# Altium PCB Projekt91_v3.PcbDoc
Units mm, origin at the board's own origin, x right, y up, seen from the top; angles counter-clockwise.
Board outline 135 x 75 mm, 2 copper layers (Top Layer, Bottom Layer); 42 components, 46 nets, 270 pads, 24 vias.
Unrouted connection lines stored in the file: 3.
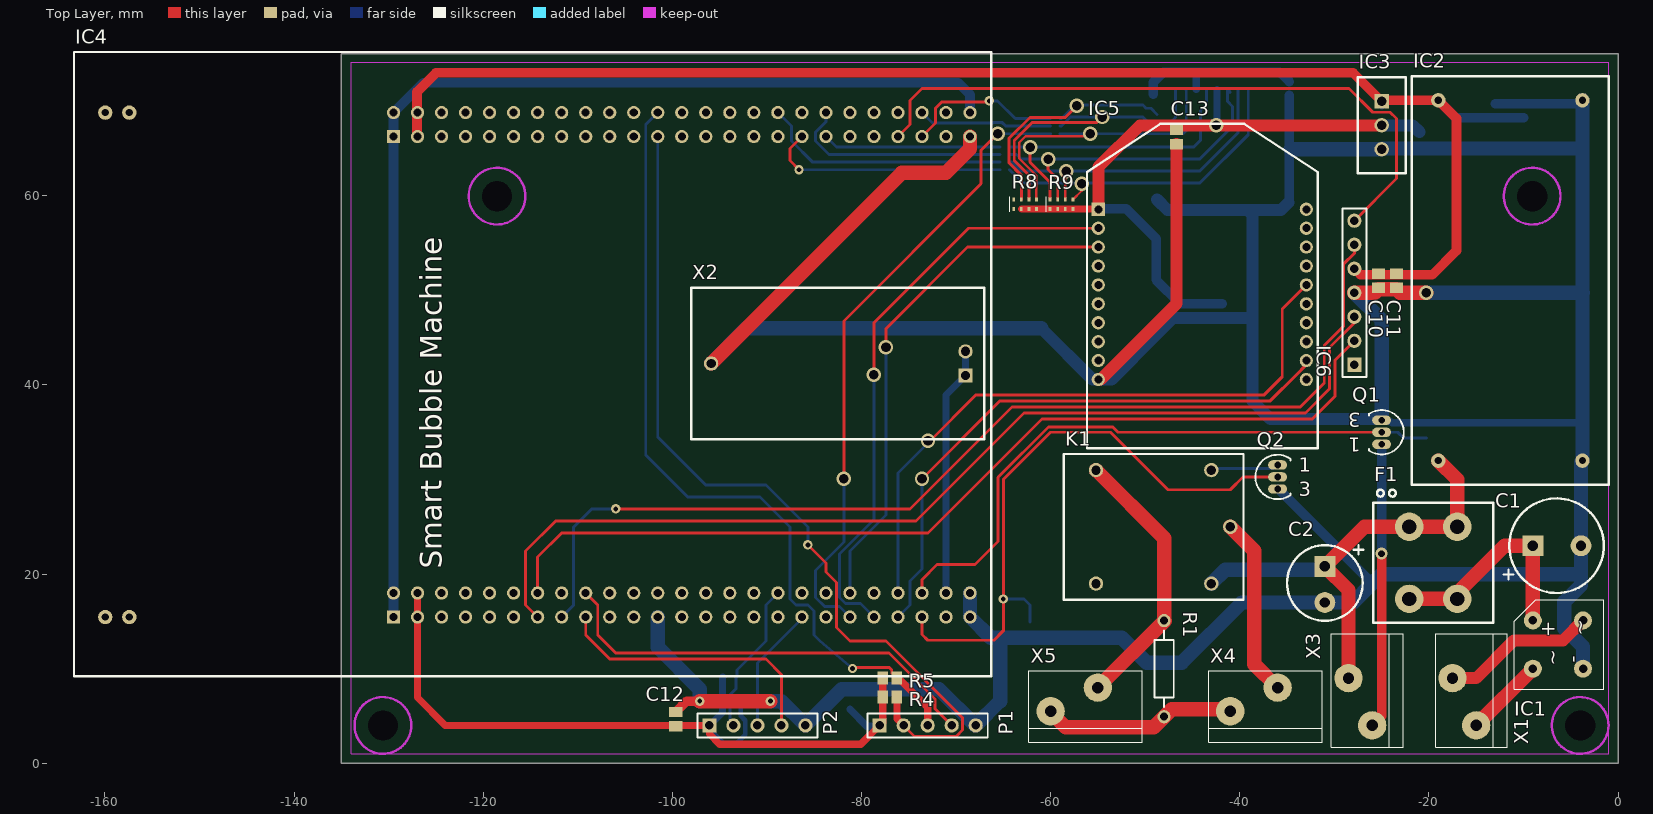
[diagram p0: Top Layer view]
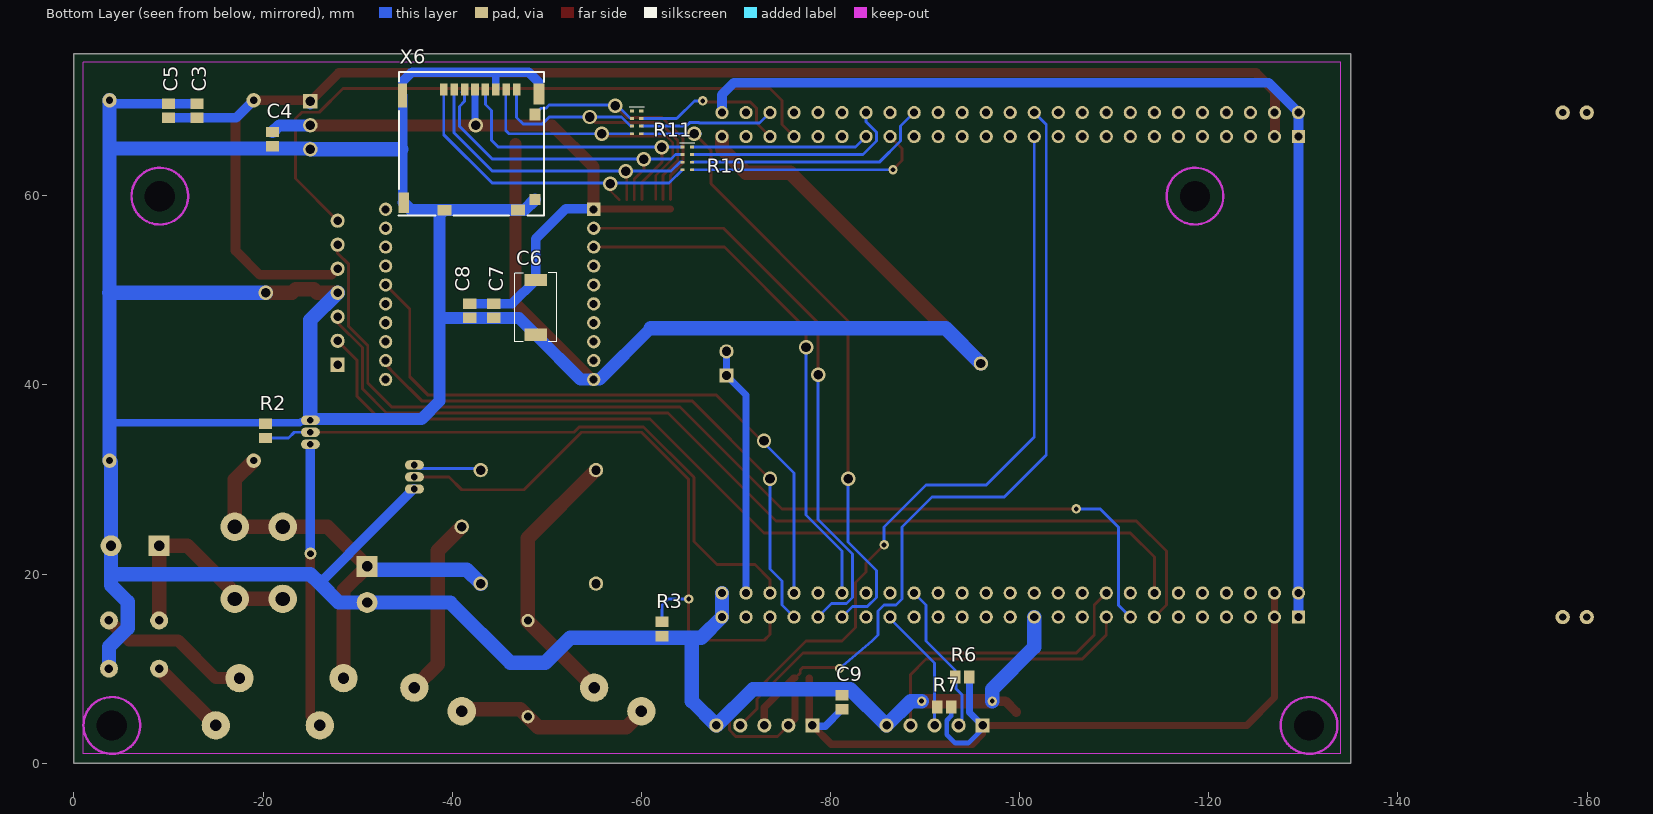
[diagram p1: Bottom Layer view, seen from below]

## Layer stack, top to bottom
Top Layer: signal copper 0.0356
Dielectric: dielectric 0.32, FR-4, Dk 4.8
Bottom Layer: signal copper 0.0356

## Board outline
-135,0 -135,75 0,75 0,0

## Design rules (kind name [scope] priority, off if disabled: settings)
Clearance 220V [(InNet('220V1') OR InNet('220V2') OR InNet('220V3'))] p1 off: gap=3 // 4mm Clearance between 220V tracks
Clearance Clearance_1 [All] p2: gap=0.254
ComponentClearance [All] p1: gap=0.254 collisioncheckmode=3 verticalgap=0.254
HoleSize [All] p1: absolutevalues=TRUE maxlimit=25.4 minlimit=0.025 maxpercent=80.000 minpercent=20.000
PolygonConnect [All] p1: connectstyle=Relief reliefconductorwidth=0.254 reliefentries=4 polygonreliefangle="90 Angle"
RoutingVias [All] p1: holewidth=0.5 width=1 viastyle="Through Hole" minholewidth=0.3 minwidth=0.3 maxholewidth=5 maxwidth=3
SolderMaskExpansion [All] p1: expansion=0.102
TestPointUsage FabricationTestPointUsage [All] p1: valid=0 allowmultiple=FALSE
Testpoint FabricationTestpoint [All] p1: side=3 testpointundercomponent=TRUE minsize=1.016 maxsize=2.54 preferedsize=1.524 minholesize=0 maxholesize=1.016 preferedholesize=0.813 testpointgrid=0.025 style=297 order=0123456789
Width [All] p1: maxlimit=1.524 minlimit=0.254 preferedwidth=0.254
17 further rules are at their usual default settings.

## Components (designator, comment, footprint, x,y, rotation, side; value= is the part's Value field where it differs from the comment)
C1 "Cap Pol1" rad-5 -9,23 r0 top
C2 "100u" RAD-3.5 -31,20.81 r270 top
C3 "10u" C0805 -13,69 r90 bottom
C4 "10u" C0805 -21,66 r270 bottom
C5 "22u" C0805 -10,69 r270 bottom
C6 "220u/Ta/low ESR" D_case -48.835,51.105 r270 bottom
C7 "100n" C0805 -44.39,47.845 r90 bottom
C8 "22u" C0805 -41.85,47.845 r90 bottom
C9 "100n" C0805 -81.22,6.455 r270 bottom
C10 "10u" c0805 -25.34,51.02 r90 top
C11 "100n" C0805 -23.435,51.02 r90 top
C12 "100n" C0805 -99.635,4.665 r270 top
C13 "100n" C0805 -46.676,66.222 r90 top
F1 "FUSE-FPG4, 1.6 AF" FUSE-FPG4 -17,17.38 r180 top
IC1 "12VDC" graetz2 -9,10 r90 top
IC2 "Regulator 12V5V" regulator -0.966,29.46 r180 top
IC3 "LM1085" TO-220 -25,70 r0 top
IC4 "STM32F4DISCOVERY" STM32F4DISC_BACK -66.277,9.217 r90 top
IC5 "RN_XV_WiFly" RN-XV -56.125,33.336 r90 top
IC6 "Header 7" HDR1X7 -27.88,42.13 r90 top
K1 "Relay-SPDT" relay -43,19 r180 top
P1 "Header 5" HDR1X5 -78.08,4 r0 top
P2 "Header 5" HDR1X5 -96.08,4 r0 top
Q1 "Power nMOS - BS170" to-92 -25,35 r180 top
Q2 "Power nMOS - BS170" to-92 -36,30.27 r0 top
R1 "1M/500 V" AXIAL-0.4 -48,10 r270 top
R2 "10k" C0805 -20.26,35.145 r90 bottom
R3 "10k" C0805 -62.17,14.19 r270 bottom
R4 "10k" C0805 -77,7 r0 top
R5 "10k" C0805 -77,9 r0 top
R6 "10k" C0805 -93.92,9.11 r0 bottom
R7 "10k" C0805 -92.015,5.935 r0 bottom
R8 "ResNet4" resnet4 -63.897,59.618 r0 top
R9 "ResNet4" resnet4 -60.049,59.602 r0 top
R10 "ResNet4" resnet4 -65.345,65.155 r270 bottom
R11 "ResNet4" resnet4 -59.995,68.965 r270 bottom
X1 "PTSA 1.5/2-3,5-Z" PTSA_2.5MM_x2 -17.5,9 r180 top
X2 "BAT_Holder" BAT_Holder -69,42.27 r180 top
X3 "PTSA 1.5/2-3,5-Z" PTSA_2.5MM_x2 -28.5,9 r180 top
X4 "PTSA 1.5/2-3,5-Z" PTSA_2.5MM_x2 -36,8 r90 top
X5 "PTSA 1.5/2-3,5-Z" PTSA_2.5MM_x2 -55,8 r90 top
X6 "SD_CARD_MOLEX" MOLEX-MICROSD-503182-1853 -39.105,71.235 r180 bottom

## Footprints (in the part's own frame and the unit in brackets; to place one, negate y for a bottom-side part, rotate by r counter-clockwise, add the part's x,y. Pads: shape width x height; smd on the part's side, far side on the other; paste and mask are expansions set on the pad)
AXIAL-0.4 [mm] "Axial Device, Thru-Hole; 2 Leads; 0.4 in Pin Spacing"
  round 1.4 hole 0.85: 1(-5.08,0) 2(5.08,0)
  silkscreen extent -4.06,-1.02 4.06,1.02
BAT_Holder [mil] "Holder for CR2032 by Renata"
  rect 60x60 hole 39.37: 1(0,50)
  round 60 hole 39.37: 2(0,-50) 3(1059.06,0)
  silkscreen extent -79,-315 1142,315
C0805 [mm] "Chip Capacitor, Body 2.0x1.3mm, IPC High Density"
  rect 1.1x1.4 smd: 1(-0.75,0) 2(0.75,0)
  body extent -1.1,-0.72 1.1,0.72, height 1.4
c0805 [mm] "Chip Capacitor, Body 2.0x1.3mm, IPC High Density"
  rect 1.1x1.4 smd: 1(-0.75,0) 2(0.75,0)
  body extent -1.1,-0.72 1.1,0.72, height 1.4
D_case [mm]
  rect 1.3x2.4 smd: 1(0,0) 2(5.8,0)
  silkscreen extent -0.75,-2.25 6.55,2.22
FUSE-FPG4 [mm]
  round 3 hole 1.5: 1(0,0) 2(5.08,0) 3(5.08,-7.62) 4(0,-7.62)
  silkscreen extent -3.81,-11.53 8.89,2.54
graetz2 [mm]
  round 1.9 hole 0.9: 1(5.1,0) 2(0,0) 3(0,-5.3) 4(5.1,-5.3)
  silkscreen extent -2.2,-7.5 7.3,2
HDR1X5 [mm] "Connector; Header; 5 Position"
  rect 1.5x1.5 hole 0.9: 1(0,0)
  round 1.5 hole 0.9: 2(2.54,0) 3(5.08,0) 4(7.62,0) 5(10.16,0)
  silkscreen extent -1.27,-1.27 11.43,1.27
HDR1X7 [mm] "Connector; Header; 7 Position"
  rect 1.5x1.5 hole 0.9: 1(0,0)
  round 1.5 hole 0.9: 2(2.54,0) 3(5.08,0) 4(7.62,0) 5(10.16,0) 6(12.7,0) 7(15.24,0)
  silkscreen extent -1.27,-1.27 16.51,1.27
MOLEX-MICROSD-503182-1853 [mm]
  rect 0.8x1.24 smd: 1(0,0) 2(1.1,0) 3(2.2,0) 4(3.3,0) 5(4.4,0) 6(5.5,0) 7(6.6,0) 8(7.7,0)
  rect 1.16x1.25 smd: 9(9.64,-2.63)
  rect 1.16x1.2 smd: 10(9.64,-11.63)
  rect 0.95x2.5 smd: 11(-4.35,-0.63)
  rect 1.15x2.2 smd: 12(10.05,-0.47) 13(-4.24,-11.96)
  rect 1.5x1.15 smd: 14(0.06,-12.76) 15(7.85,-12.75)
  silkscreen extent -4.78,-13.33 10.59,1.87
PTSA_2.5MM_x2 [mm]
  round 3 hole 1.2: 1(0,0) 2(-2.5,5)
  silkscreen extent -5.8,-4.7 1.8,7.3
RAD-3.5 [mm] "Radial 3.5mm; 8mm diameter"
  rect 2.2x2.2 hole 1.1: 1(0,0)
  round 2.2 hole 1.1: 2(3.81,0)
  silkscreen extent -2.27,-4 5.75,4.05
rad-5 [mm] "Radial 5mm; 10mm diameter"
  rect 2.2x2.2 hole 1.1: 1(0,0)
  round 2.2 hole 1.1: 2(5.08,0)
  silkscreen extent -3.09,-5 7.5,5
regulator [mil]
  round 60 hole 30: 1(710,-100) 2(110,-100) 3(710,-1600) 4(110,-1600)
  silkscreen extent 0,-1700 820,0
relay [mm]
  round 1.524 hole 1: 1(-2,-6) 2(12.2,0) 3(12.2,-12) 4(0,0) 5(0,-12)
  silkscreen extent -3.4,-13.7 15.6,1.7
resnet4 [mm]
  rect 0.3x0.45 smd: 1(0,0) 2(0.8,0) 3(1.6,0) 4(2.4,0) 5(0,-1) 6(0.8,-1) 7(1.6,-1) 8(2.4,-1)
  silkscreen extent -0.4,-1.3 -0.4,0.3
RN-XV [mm] "RN-XV WiFly Pinout"
  rect 1.4x1.4 hole 0.85: 1(25.239,-1.165)
  round 1.4 hole 0.85: 2(23.239,-1.165) 3(21.239,-1.165) 4(19.239,-1.165) 5(17.239,-1.165) 6(15.239,-1.165) 7(13.239,-1.165) 8(11.239,-1.165) 9(9.239,-1.165) 10(7.239,-1.168) 11(7.239,-23.165) 12(9.239,-23.165) 13(11.239,-23.165) 14(13.239,-23.165) 15(15.239,-23.165) 16(17.239,-23.165) 17(19.239,-23.165) 18(21.239,-23.165) 19(23.239,-23.165) 20(25.239,-23.165)
  silkscreen extent -0.03,-24.36 34.26,0.03, body extent 0,-24.38 34.29,0, height 12
STM32F4DISC_BACK [mm] "STM32F4Discovery without pins [101..106]"
  rect 1.4x1.4 hole 0.85: 1(6.243,63.203) 51(57.043,63.203)
  round 1.4 hole 0.85: 2(8.783,63.203) 3(6.243,60.663) 4(8.783,60.663) 5(6.243,58.123) 6(8.783,58.123) 7(6.243,55.583) 8(8.783,55.583) 9(6.243,53.043) 10(8.783,53.043) 11(6.243,50.503) 12(8.783,50.503) 13(6.243,47.963) 14(8.783,47.963) 15(6.243,45.423) 16(8.783,45.423) 17(6.243,42.883) 18(8.783,42.883) 19(6.243,40.343) 20(8.783,40.343) 21(6.243,37.803) 22(8.783,37.803) 23(6.243,35.263) 24(8.783,35.263) 25(6.243,32.723) 26(8.783,32.723) 27(6.243,30.183) 28(8.783,30.183) 29(6.243,27.643) 30(8.783,27.643) 31(6.243,25.103) 32(8.783,25.103) 33(6.243,22.563) 34(8.783,22.563) 35(6.243,20.023) 36(8.783,20.023) 37(6.243,17.483) 38(8.783,17.483) 39(6.243,14.943) 40(8.783,14.943) 41(6.243,12.403) 42(8.783,12.403) 43(6.243,9.863) 44(8.783,9.863) 45(6.243,7.323) 46(8.783,7.323) 47(6.243,4.783) 48(8.783,4.783) 49(6.243,2.243) 50(8.783,2.243) 52(59.583,63.203) 53(57.043,60.663) 54(59.583,60.663) 55(57.043,58.123) 56(59.583,58.123) 57(57.043,55.583) 58(59.583,55.583) 59(57.043,53.043) 60(59.583,53.043) 61(57.043,50.503) 62(59.583,50.503) 63(57.043,47.963) 64(59.583,47.963) 65(57.043,45.423) 66(59.583,45.423) 67(57.043,42.883) 68(59.583,42.883) 69(57.043,40.343) 70(59.583,40.343) 71(57.043,37.803) 72(59.583,37.803) 73(57.043,35.263) 74(59.583,35.263) 75(57.043,32.723) 76(59.583,32.723) 77(57.043,30.183) 78(59.583,30.183) 79(57.043,27.643) 80(59.583,27.643) 81(57.043,25.103) 82(59.583,25.103) 83(57.043,22.563) 84(59.583,22.563) 85(57.043,20.023) 86(59.583,20.023) 87(57.043,17.483) 88(59.583,17.483) 89(57.043,14.943) 90(59.583,14.943) 91(57.043,12.403) 92(59.583,12.403) 93(57.043,9.863) 94(59.583,9.863) 95(57.043,7.323) 96(59.583,7.323) 97(57.043,4.783) 98(59.583,4.783) 99(57.043,2.243) 100(59.583,2.243)
  round 1.524 hole 0.762: 101(6.243,91.143) 102(6.243,93.683) 103(59.583,91.143) 104(59.583,93.683)
  silkscreen extent -0.01,-0.01 65.99,96.99, body extent 0,0 66,97, height 12
to-92 [mm] "TO, Flat Index; 3 In-Line, Axial Leads; Body Dia. 4.6mm; Leads 0.41 x 0.39 mm (max)"
  oval 2x1 hole 0.7: 1(0,1.27) 2(0,0) 3(0,-1.27)
  silkscreen extent -2.34,-2.34 1.35,2.34
TO-220 [mil]
  rect 60x60 hole 39.37: 1(0,0)
  round 60 hole 39.37: 2(0,-100) 3(0,-200)
  silkscreen extent -100,-300 100,100

## Part data
C1: "Polarized Capacitor (Radial)"
C2 C6: library part "Cap Pol1", "Polarized Capacitor (Radial)"
C3 C4: library part "Cap Pol3", "Polarized Capacitor (Surface Mount)"
C5 C7 C8 C9 C10 C11 C12 C13: library part Cap, "Capacitor"
F1: library part FUSE-FPG4
IC1: library part Bridge2, "Diode Bridge"
IC2: library part Regulator
IC4: library part STM32F4DISC_w/o[101..106]
IC6: "Header, 7-Pin"
K1: "Single-Pole Dual-Throw Relay"
P1 P2: "Header, 5-Pin"
Q1 Q2: library part MOSFET-N, "N-Channel MOSFET"
R1 R2 R3 R4 R5 R6 R7: library part Res2, "Resistor"
X1 X3 X4 X5: library part "Header 2", "Header, 2-Pin"

## Free pads (board coordinates)
  round 3 hole 3.2: 0(-130.6,4) 0(-118.535,59.965) 0(-9.08,59.965) 0(-4,4) 0(-4,4)

## Via types
v1: diameter 1.524, hole 1.016, Top Layer to Bottom Layer, 15 vias
v2: diameter 1, hole 0.5, Top Layer to Bottom Layer, 8 vias
v3: diameter 1.27, hole 0.711, Top Layer to Bottom Layer, 1 vias

## Nets (pads, with @x,y where several pads share a name; then routed paths per layer and width w, separated by ;. In a path a pad name is that pad's centre, name@x,y a point inside that pad or via, vN(x,y) a via of type N, cw(c..) or ccw(c..) an arc to the next point about the centre after c; other vN are vias at no path point)
220V1: K1.1 X4.1 | length 19.1
  Top Layer w1.524: K1.1 -38.476,22.476 -38.476,10.476 X4.1
220V2: R1.2 X4.2 X5.2 | length 20.3
  Top Layer w1.524: X5.2 -60,5.39 -58.42,3.81 -49.11,3.81 -47.205,5.715 X4.2@-41.275,5.715
220V3: K1.3 R1.1 X5.1 | length 28.5
  Top Layer w1.524: K1.3 -48,23.8 R1.1@-48,15.478 ; X5.1 R1.1@-47.92,15.08
+3.3V: C9.2 C12.2 IC4.3 IC4.4 P1.1 P2.1 R4.1 R5.1 R6.1 R7.1 | length 86.3
  Top Layer w0.762: IC4.4 IC4.3 -126.94,6.94 -124,4 P2.1 -96.08,3.08 -95,2 -80.08,2 P1.1 -77.75,4.33 R4.1 R5.1
  Bottom Layer w0.508: P2.1 -96.08,3.65 -94.555,2.125 -93.184,2.125 -92.282,3.027 -92.282,4.521 -92.765,5.004 R7.1
  Bottom Layer w0.762: P2.1 -94.707,5.373 -94.707,9.073 R6.1 ; C9.2 -79.43,3.915 -78.165,3.915 P1.1
+3.3V-WIFLY: C4.1 C6.1 C7.2 C8.2 C13.2 IC3.2 IC5.1 R8.6 R8.7 R8.8 R9.5 R9.6 R9.7 R9.8 X6.4 | length 72.2
  Top Layer w0.762: R8.6@-63.081,58.602 R9.5 R9.6 R9.7 R9.8 -54.987,58.602 IC5.1
  Top Layer w1.27: IC5.1 -54.96,63.04 -50.54,67.46 v1(-42.485,67.46) IC3.2
  Bottom Layer w0.762: v1@-42.405,67.54 X6.4
  Bottom Layer w1.016: IC5.1 -54.895,58.64 -52.01,58.64 -48.835,55.465 C6.1 -46.325,48.595 C7.2 C8.2
  Bottom Layer w1.27: IC3.2 -21.71,67.46 C4.1
+5V: C3.1 C5.2 C10.2 C11.2 IC2.3 IC3.1 IC4.53 IC4.54 IC6.5 | length 153.7
  Top Layer w1.016: IC4.53 -127,66.32 -127,71 -125,73 -28,73 IC3.1 ; IC6.5 -27.245,51.655 -19.625,51.655 -17.085,54.195 -17.085,68.185 IC2.3 IC3.1@-24.9,70.1
  Bottom Layer w1.016: IC3.1@-25,69.615 IC3.1 ; IC2.3 -17.15,68.25 C5.2
+12V: C2.1 F1.3 F1.4 IC2.1 K1.4 X3.1 | length 49.2
  Top Layer w1.524: X3.1 -28.5,18.31 C2.1 -26.81,25 F1.3 F1.4 -17,30 IC2.1
  Bottom Layer w1.524: K1.4 -41.524,20.476 -31.334,20.476 C2.1
GND: C1.2 C2.2 C3.2 C4.2 C5.1 C6.2 C7.1 C8.1 C9.1 C10.1 C11.1 C12.1 C13.1 IC1.3 IC2.2 IC2.4 IC3.3 IC4.1 IC4.2 IC4.5 IC4.23 IC4.49 IC4.50 IC4.51 IC4.52 IC4.99 IC4.100 IC5.10 IC6.4 P1.5 P2.5 Q1.3 Q2.3 R2.2 R3.2 X2.3 X6.6 X6.10 X6.11 X6.12 X6.13 X6.14 X6.15 | length 634.1
  Top Layer w1.016: C12.1 -98.48,6.57 v2(-97.095,6.57)
  Top Layer w1.27: IC5.10 -54.713,40.575 -46.676,48.612 C13.1
  Top Layer w1.524: v2(-97.095,6.57) v2(-89.628,6.57) ; X2.3 -75.72,62.45 -71.06,62.45 -68.52,64.99 IC4.99 ; IC6.4 -25.721,49.75 -25.34,50.131 -23.435,50.131 -23.054,49.75 v1(-20.26,49.75)
  Bottom Layer w0.762: X6.6 -44.605,72.992 ; X6.13 X6.13@-34.755,59.385 ; Q1.3 -24.865,36.135 -24.03,36.135 -23.895,36 -3.76,36
  Bottom Layer w1.016: IC4.1 IC4.2 IC4.51 IC4.52 -126.305,71.975 -69.79,71.975 -68.52,70.705 IC4.100 ; X6.12 -49.155,71.998 -48.073,73.08 -35.754,73.08 -34.755,72.081 ; Q2.3 -35.912,29 -29.138,22.226 -29.138,22.188 -25.975,19.025 ; X6.13@-34.755,59.385 X6.11 ; C3.2 -4.11,69.75 IC2.4
  Bottom Layer w1.27: -61,46 -55.575,40.575 IC5.10 -53.565,40.575 C6.2 -47.045,47.095 C7.1 C8.1 -38.79,47.095 -38.675,47.21 ; X6.10 -47.615,58.475 X6.14 ; X6.13 -35.665,58.475 X6.14 ; Q1.3@-25,36.389 -36.744,36.389 -38.675,38.32 -38.675,47.21 ; X6.14 -38.675,57.985 -38.675,47.21
  Bottom Layer w1.524: IC4.23 -101.54,12.285 -97.095,7.84 v2(-97.095,6.57) ; X2.3 -92.17,46 -61,46 ; v2(-89.628,6.57) -88.49,6.57 P2.5 -82.08,7.84 -71.803,7.84 -67.963,4 P1.5 -65.345,6.575 -65.345,13.262 ; IC4.50 IC4.49 -66.322,13.262 -65.345,13.262 ; -34.596,64.92 IC3.3 -24.92,65 -4,65 ; IC6.4 -25,46.87 Q1.3@-25,36.516 ; v1(-20.26,49.75) -3.75,49.75 ; IC2.4 -3.76,36 IC2.2 -3.92,31.84 C1.2 -3.92,20 ; IC1.3 -3.7,12.32 -5.666,14.286 -5.666,17.066 -3.92,18.812 -3.92,20 ; -65.345,13.262 -52.492,13.262 -49.848,10.618 -46.152,10.618 -39.77,17 C2.2 -28,17 -25.975,19.025 -25,20 -3.92,20
GPIO_HC_KEY: IC4.15 IC6.6 | length 111.7
  Top Layer w0.305: v2(-105.985,26.89) -74.87,26.89 -64.075,37.685 -33.595,37.685 -31.061,40.219 -31.061,44.184 -29.048,46.197 -29.048,52.757 -27.88,53.925 IC6.6
  Bottom Layer w0.305: IC4.15 -110.43,16.73 -110.43,24.985 -108.525,26.89 v2(-105.985,26.89)
GPIO_HC_RESET: IC4.93 IC6.7 | length 70.2
  Top Layer w0.305: IC4.93 -74.87,67.53 -74.87,70.07 -73.6,71.34 -28.439,71.34 -25.93,68.832 -24.102,68.832 -23.435,68.165 -23.435,61.815 IC6.7
GPIO_HC_SATE: IC4.16
GPIO_HC_STATE: IC6.1
GPIO_RDY_1: IC4.18 | length 47
  Top Layer w0.305: IC4.18 -107.89,16.73 -107.89,13.555 -105.985,11.65 -77.075,11.65 -72.213,6.787 -72.213,5.753 -70.46,4
GPIO_RDY_2: IC4.17 P1.4 P2.4 | length 29.7
  Top Layer w0.305: IC4.17 -109.16,13.555 -106.62,11.015 -90.11,11.015 -88.46,9.365 P2.4
NetC1_1: C1.1 F1.1 F1.2 IC1.1 | length 23.7
  Top Layer w1.524: F1.2 F1.1 -17,18 -12,23 C1.1 IC1.1
NetIC1_2: IC1.2 X1.2 | length 9
  Top Layer w1.524: X1.2@-15.5,4 X1.2 IC1.2
NetIC1_4: IC1.4 X1.1 | length 16.3
  Top Layer w1.27: X1.1 -15,9 -11,13 -5.8,13 IC1.4
NetK1_5: K1.5 Q2.1 | length 7.2
  Bottom Layer w0.305: K1.5 -42.824,31.176 -36.364,31.176 Q2.1
NetQ1_1: Q1.1 X3.2 | length 30.1
  Top Layer w1.016: X3.2 -25,5 v3(-25,22.155)
  Bottom Layer w1.016: v3(-25,22.155) Q1.1
NetR8_2: R8.2 R11.6 X6.9 | length 26.9
  Top Layer w0.305: R8.2 -63.097,62.183 -64.405,63.491 -64.405,66.081 -62.194,68.292 -58.449,68.292 v1(-57.217,69.524)
  Bottom Layer w0.305: R11.6 -58.845,68.165 -57.41,69.6 -50.24,69.6 -49.898,69.259 -49.399,69.259 X6.9
NetR8_3: R8.3 R11.7 X6.8 | length 33.3
  Top Layer w0.305: R8.3 -62.297,62.173 -63.846,63.723 -63.846,65.849 -61.962,67.733 -55.147,67.733 v1(-54.55,68.33)
  Bottom Layer w0.305: R11.7 -58.845,67.365 -57.88,68.33 v1(-54.55,68.33) -50.25,68.33 -49.493,67.574 -47.521,67.574 -46.805,68.29 X6.8
NetR8_4: R8.4 R11.8 X6.7 | length 32.1
  Top Layer w0.254: R8.4 -61.497,62.128 -63.313,63.944 -63.313,65.628 -62.643,66.298 v1@-56.087,66.298
  Bottom Layer w0.305: R11.8 v1(-55.82,66.565) -45.99,66.565 -45.66,66.895 -45.66,71.19 X6.7
NetR9_1: R9.1 R10.5 X6.5 | length 32.6
  Top Layer w0.305: v1(-62.17,65.155) -62.17,63.555 -60.049,61.434 R9.1
  Bottom Layer w0.305: R10.5 v1(-62.17,65.155) -44.86,65.155 -44.136,65.879 -44.136,69.016 -43.505,69.647 X6.5
NetR9_2: R9.2 R10.6 X6.3 | length 34.4
  Top Layer w0.305: v1(-60.265,63.885) -60.265,62.793 -59.249,61.777 R9.2
  Bottom Layer w0.305: R10.6 -63.605,64.355 -63.135,63.885 v1(-60.265,63.885) -44.225,63.885 -40.764,67.346 -40.764,69.454 -41.305,69.995 X6.3 X6.3@-41.011,70.941
NetR9_3: R9.3 R10.7 X6.2 | length 33.7
  Top Layer w0.305: R9.3 v1@-58.449,62.526
  Bottom Layer w0.305: R10.7 -64.075,63.555 -63.135,62.615 v1(-58.36,62.615) -44.225,62.615 -40.205,66.635 X6.2
NetR9_4: R9.4 R10.8 X6.1 | length 34.8
  Top Layer w0.254: R9.4 -56.709,60.542 v1(-56.709,61.269)
  Bottom Layer w0.305: R10.8 -62.935,61.345 -44.225,61.345 -39.105,66.465 X6.1
PD13: IC4.45 Q2.2 R3.1 | length 66.2
  Top Layer w0.305: IC4.45 -73.6,13.6 -73,13 -66,13 -65,14 v2(-65,17.365) -65,30 -60,35 -53.664,35 -47.579,28.914 -41,28.914 -39.644,30.27 Q2.2
  Bottom Layer w0.305: v2(-65,17.365) -62.805,17.365 -62.17,16.73 R3.1
PWM: IC4.46 Q1.2 R2.1 | length 65.9
  Top Layer w0.305: IC4.46 -73.6,19.4 -72,21 -68,21 -65.559,23.441 -65.559,30.231 -60.231,35.559 -53.433,35.559 -52.874,35 Q1.2
  Bottom Layer w0.305: Q1.2 -23.29,35 -22.685,34.395 R2.1
SCL_1: IC4.73 P1.2 R4.2 | length 92.3
  Top Layer w0.305: v2(-85.665,23.08) -83.76,21.175 -83.76,20.213 -82.654,19.106 -82.654,14.354 -81.22,12.92 -77.41,12.92 -69.304,4.814 -69.304,3.521 -69.981,2.844 -74.384,2.844 P1.2
  Top Layer w0.762: R4.2 -76.25,4.71 P1.2
  Bottom Layer w0.305: IC4.73 -101.54,34.51 -96.46,29.43 -90.11,29.43 -85.665,24.985 v2(-85.665,23.08)
SCL_2: IC4.34 P2.2 R6.2 | length 16.2
  Bottom Layer w0.305: P2.2 -93.92,4.38 -93.92,7.205 -93.285,7.84 R6.2@-93.285,9.11 ; R6.2 -93.17,9.86 -90.11,12.92 -90.11,16.73 IC4.34
SD_CD: IC4.39 R11.4 | length 67.8
  Top Layer w0.305: v1(-81.855,30.065) -81.855,46.778 -67.352,61.282 -67.352,64.812 v1(-65.599,66.565)
  Bottom Layer w0.305: v1(-81.855,30.065) -81.855,23.391 -84.866,20.379 -84.866,17.542 -83.891,16.566 -82.326,16.566 IC4.39 ; v1@-66.272,66.565 v1(-65.599,66.565) R11.4
SDA_1: IC4.74 P1.3 R5.2 | length 85.6
  Top Layer w0.305: v2(-80.946,10.019) -80.946,10.106 -77.032,10.106 -76.794,9.868 -76.794,9.544 R5.2
  Top Layer w0.762: R5.2 -76.102,9 -73,5.898 P1.3
  Bottom Layer w0.305: IC4.74 -102.81,67.53 -102.81,32.605 -98.365,28.16 -90.745,28.16 -87.57,24.985 -87.57,17.365 -86.935,16.73 -85.665,16.73 -85.03,16.095 -85.03,13.555 -84.395,12.92 v2(-80.946,10.019)
SDA_2: IC4.35 P2.3 R7.2 | length 13.4
  Bottom Layer w0.305: P2.3 -91,10.605 -86.3,15.305 IC4.35
SDIO_CK: IC4.85 R10.4 | length 25.7
  Top Layer w0.305: v2(-86.605,62.755) -87.57,63.72 -87.57,64.99 IC4.85
  Bottom Layer w0.305: v2(-86.605,62.755) R10.4
SDIO_CMD: IC4.84 R10.3 | length 26.6
  Bottom Layer w0.305: IC4.84 -87.406,67.366 -87.406,65.802 -85.16,63.555 R10.3
SDIO_D0: IC4.95 R11.2 | length 16.9
  Top Layer w0.305: IC4.95 -72.166,67.694 -72.166,69.258 -71.518,69.906 -66.614,69.906 v2(-66.488,70.032)
  Bottom Layer w0.305: v2(-66.488,70.032) -65.599,70.032 -63.732,68.165 R11.2
SDIO_D1: IC4.96 R11.3 | length 14.2
  Bottom Layer w0.305: IC4.96 -72.494,67.694 -66.123,67.694 -66.083,67.733 -65.115,67.733 -64.747,67.365 R11.3
SDIO_D2: IC4.87 R10.1 | length 18.9
  Bottom Layer w0.305: IC4.87 -82.654,65.154 -65.346,65.154 R10.1
SDIO_D3: IC4.88 R10.2 | length 23.6
  Bottom Layer w0.305: IC4.88 -83.76,67.825 -84.866,66.718 -84.866,65.802 -83.42,64.355 R10.2
USART2_RX: IC4.13 IC6.3 | length 108.3
  Top Layer w0.305: IC4.13 -115.51,16.73 -115.51,22.445 -112.335,25.62 -74.235,25.62 -62.805,37.05 -33.043,37.05 -30.503,39.59 -30.503,43.952 -27.88,46.575 IC6.3
USART2_TX: IC4.14 IC6.2 | length 101.9
  Top Layer w0.305: IC4.14 -114.24,21.81 -111.7,24.35 -72.965,24.35 -60.9,36.415 -32.325,36.415 -29.944,38.796 -29.944,42.606 IC6.2
USART3_CTS: IC4.43 IC5.12 | length 61.7
  Top Layer w0.305: v1(-73.6,30.065) -65.345,38.32 -36.77,38.32 -34.066,41.024 -34.066,41.033 -32.96,42.14 IC5.12
  Bottom Layer w0.305: IC4.43 -74.87,16.73 -74.87,19.27 -73.6,20.54 v1(-73.6,30.065)
USART3_RTS: IC4.44 IC5.16 | length 68.3
  Top Layer w0.305: v1@-72.921,33.919 -67.885,38.955 -37.405,38.955 -35.5,40.86 -35.5,48.035 IC5.16
  Bottom Layer w0.305: IC4.44 -76.14,30.7 v1@-72.965,33.875
  other v1: -72.965,34.091
USART3_RX: IC4.41 IC5.2 | length 63.1
  Top Layer w0.305: v1(-78.68,41.076) -78.68,46.575 -68.68,56.575 IC5.2
  Bottom Layer w0.305: IC4.41 -80.114,16.894 -81.678,16.894 -82.326,17.542 -82.326,22.129 -78.68,25.775 v1(-78.68,41.076) v1@-78.553,41.203
USART3_TX: IC4.40 IC5.3 | length 55.5
  Top Layer w0.305: v1(-77.41,43.997) -77.41,45.94 -68.775,54.575 IC5.3
  Bottom Layer w0.305: IC4.40 -81.22,22.445 -77.41,26.255 v1(-77.41,43.997)
VBAT: IC4.48 X2.1 X2.2 | length 26.4
  Bottom Layer w0.762: IC4.48 -71.06,38.94 X2.1 X2.2
pads on no net: IC4.6 IC4.7 IC4.8 IC4.9 IC4.10 IC4.11 IC4.12 IC4.19 IC4.20 IC4.21 IC4.22 IC4.24 IC4.25 IC4.26 IC4.27 IC4.28 IC4.29 IC4.30 IC4.31 IC4.32 IC4.33 IC4.36 IC4.37 IC4.38 IC4.42 IC4.47 IC4.55 IC4.56 IC4.57 IC4.58 IC4.59 IC4.60 IC4.61 IC4.62 IC4.63 IC4.64 IC4.65 IC4.66 IC4.67 IC4.68 IC4.69 IC4.70 IC4.71 IC4.72 IC4.75 IC4.76 IC4.77 IC4.78 IC4.79 IC4.80 IC4.81 IC4.82 IC4.83 IC4.86 IC4.89 IC4.90 IC4.91 IC4.92 IC4.94 IC4.97 IC4.98 IC4.101 IC4.102 IC4.103 IC4.104 IC5.4 IC5.5 IC5.6 IC5.7 IC5.8 IC5.9 IC5.11 IC5.13 IC5.14 IC5.15 IC5.17 IC5.18 IC5.19 IC5.20 K1.2 R8.1 R8.5 R11.1 R11.5

## Keep-outs
Keep-Out Layer:
  circle w0.254: c-4,4 r3
  circle w0.254: c-4,4 r3
  circle w0.254: c-9.08,59.965 r3
  circle w0.254: c-118.535,59.965 r3
  circle w0.254: c-130.6,4 r3
  lines w0.1: -133.925,1 -133.925,74.1 -1,74.1 -1,1 -133.925,1

## Silkscreen, mask and mechanical layers (free items; w line width, h text height)
Top Overlay:
  text "Smart Bubble Machine" at -124.4,20.54 h2.29 r90
Mechanical 1:
  the board outline again, w0.1

## Dimensions
0,0 to -135,0 on Mechanical 2
0,75 to 0,0 on Mechanical 2

## Text inside footprints (layer, text, board x,y; h text height)
IC1: Top Overlay "-" at -4.1,10.6 h1.52 r90; Top Overlay "+" at -6.7,13.3 h1.52 r90; Top Overlay "~" at -3.3,13.5 h1.52 r90; Top Overlay "~" at -6.2,10.3 h1.52 r90
Q1: Top Overlay "1" at -27.224,34.44 h1.5 r180; Top Overlay "3" at -27.224,37.035 h1.5 r180
Q2: Top Overlay "1" at -33.776,30.83 h1.5; Top Overlay "3" at -33.776,28.235 h1.5